# Allegro board carte_joystick2.brd
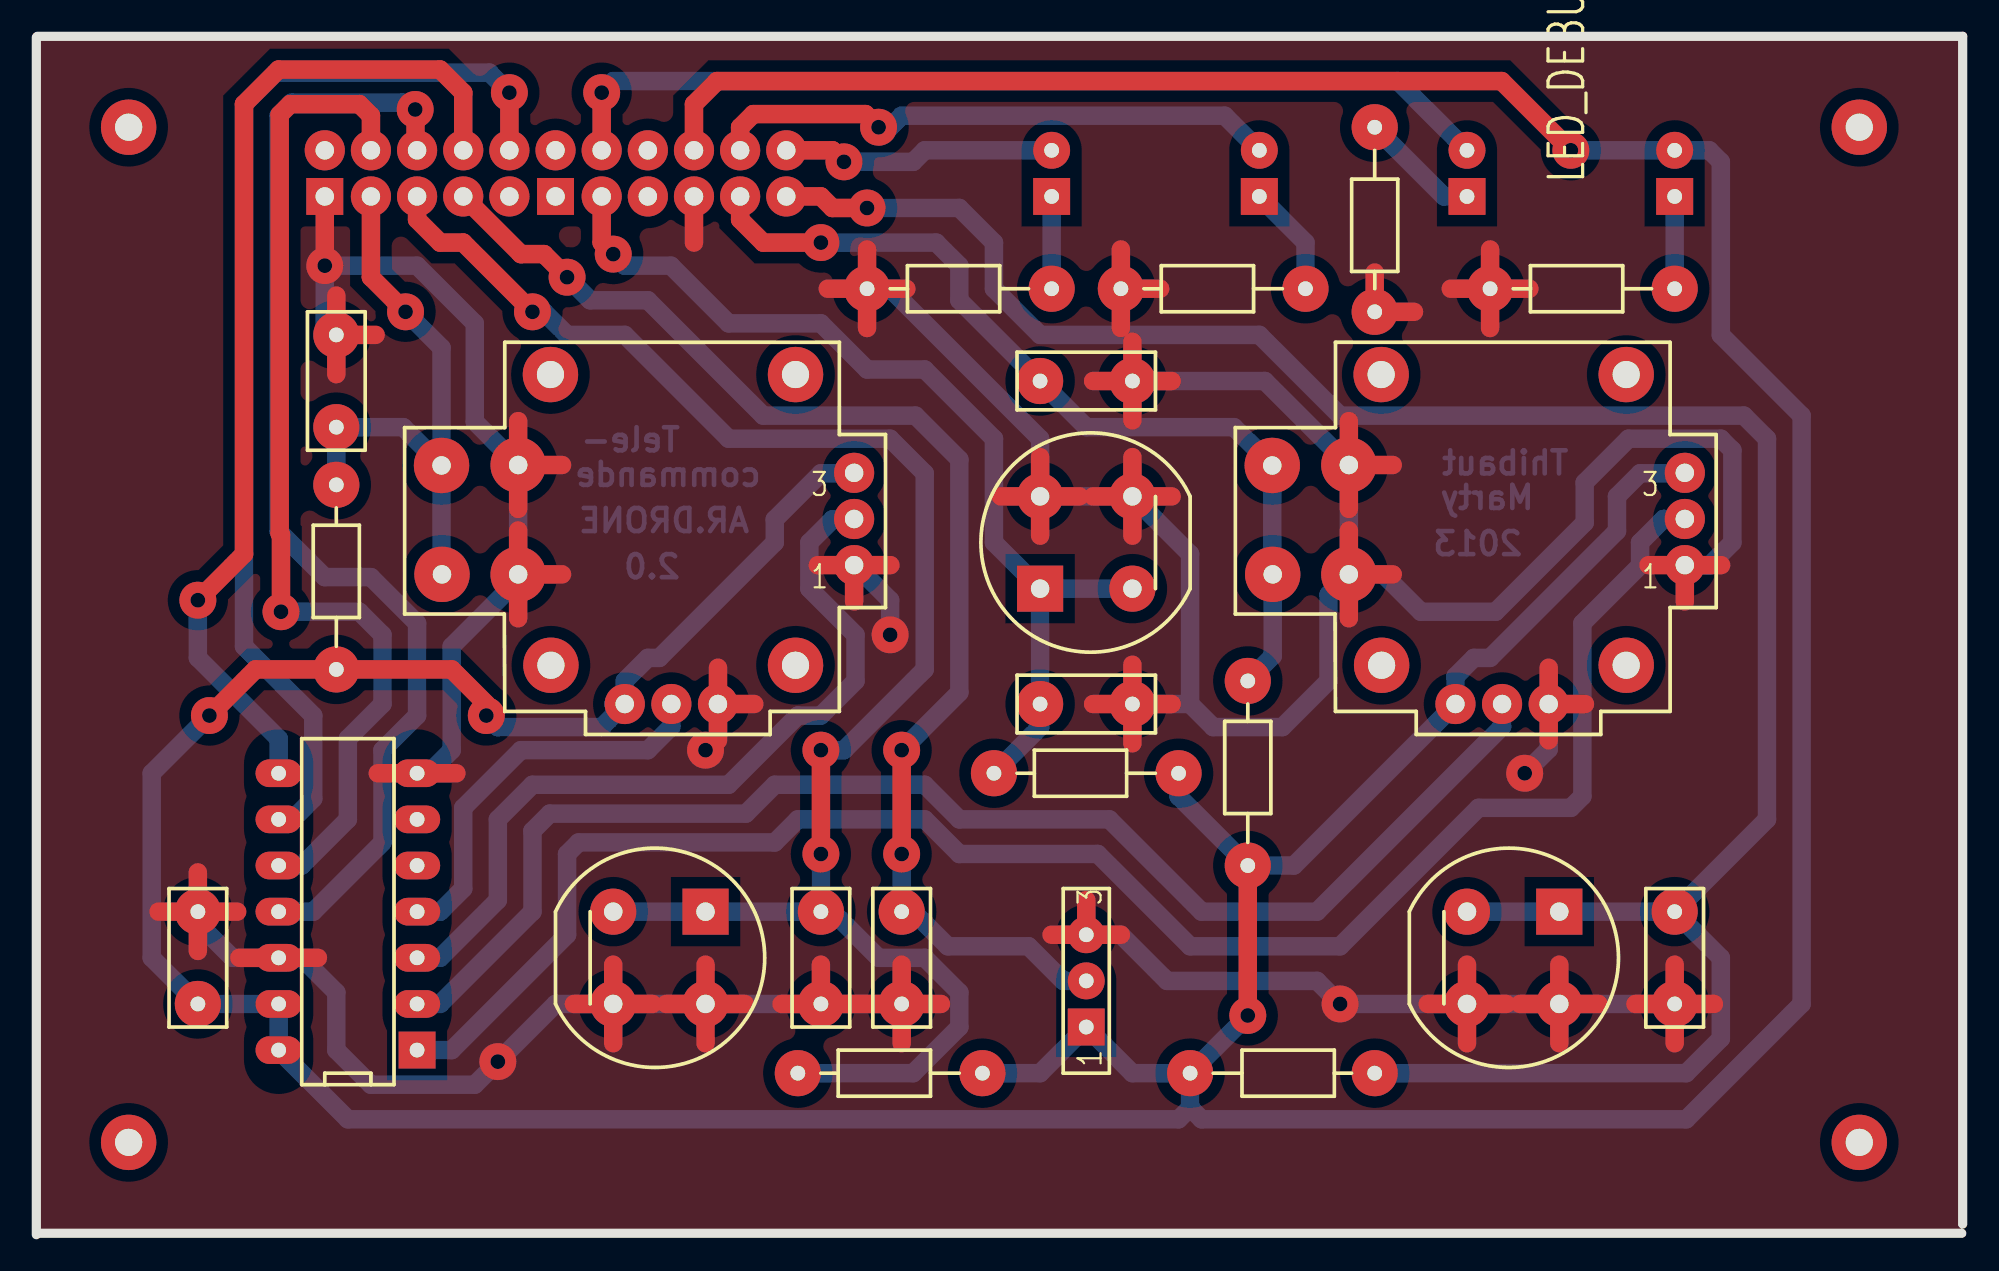
[diagram p0: board, top side]
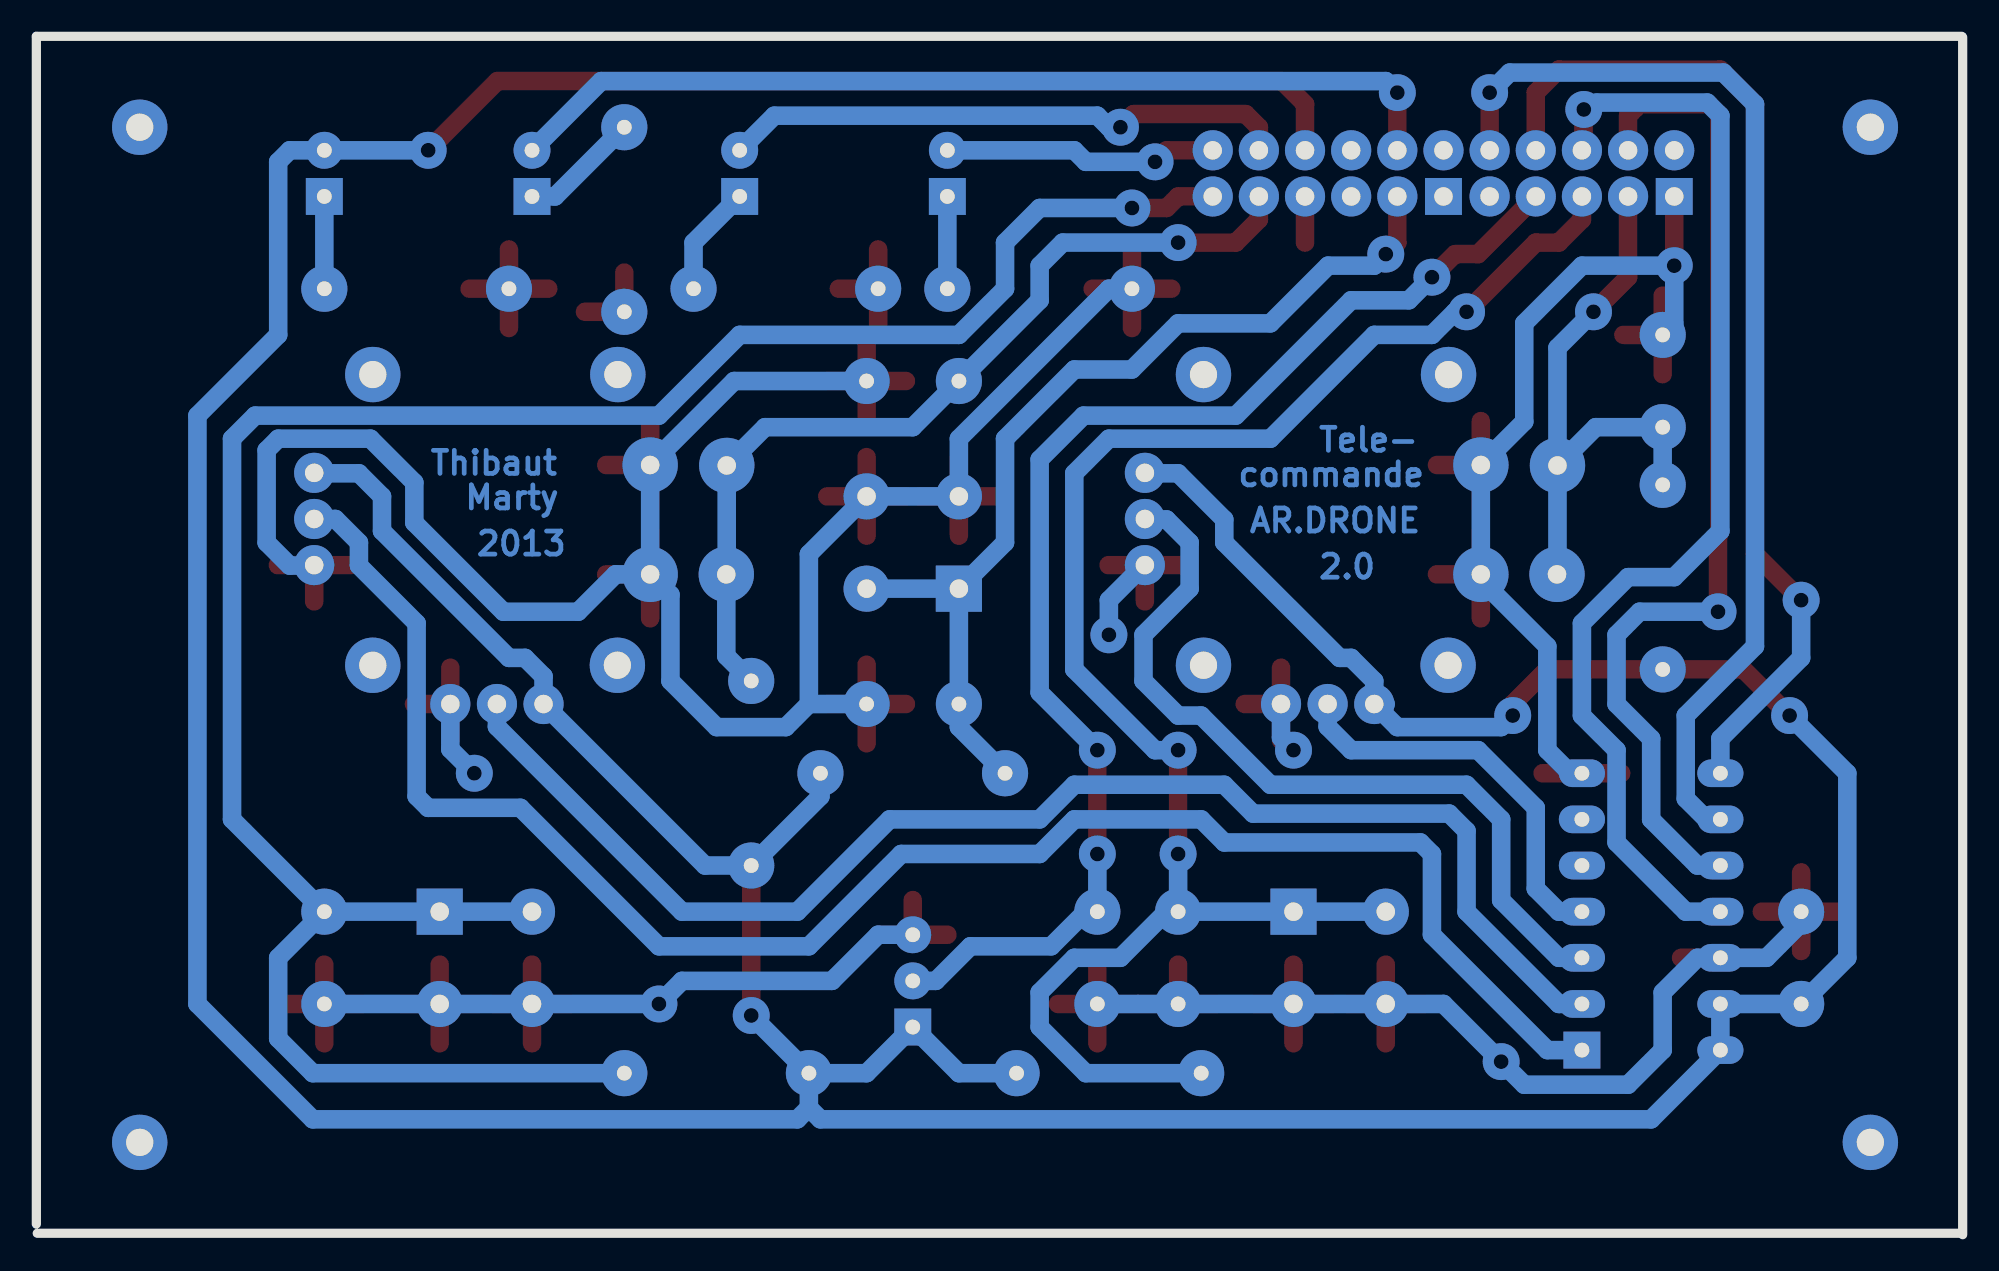
[diagram p1: board, bottom side, seen from below]

Outline 106.02 x 65.96 mm; copper layers: TOP, BOTTOM. Coordinates in mm from the lower left corner of the outline.

## Placement (name value [footprint] x y rotation side)
C1  100nF  [C]  55.24 29.21 0 top
C2  100nF  [C]  43.18 17.78 270 top
C3  100nF  [C]  90.17 17.78 270 top
C4  100nF  [C]  16.51 44.45 90 top
C5  100nF  [C]  55.24 46.99 0 top
C6  100nF  [C]  47.62 12.7 90 top
C7  100nF  [C]  8.89 12.7 90 top
J3  MCP3302  [DIL_14]  20.96 10.16 90 top
J5  CON10  [BARETTE2X5]  15.87 57.15 0 top
J6  CON12  [BARETTE2X6]  28.57 57.15 0 top
LED_ALIM  -  [LED]  90.17 57.15 90 top
LED_CONNECT  -  [LED]  55.88 57.15 90 top
LED_DEBUG  -  [LED]  78.74 57.15 90 top
LED_ERREUR  -  [LED]  67.31 57.15 90 top
NOREF  -  [unnamed]  -5.08 -5.08 0 top
P1  control  [MINISTICK2]  32.38 29.21 0 top
P2  inclinaison  [MINISTICK2]  78.11 29.21 0 top
R1  1k  [R_P]  52.7 25.4 0 top
R2  1k  [R_P]  41.91 8.89 0 top
R3  1k  [R_P]  73.66 8.89 180 top
R4  560  [R_P]  80.01 52.07 0 top
R5  560  [R_P]  45.72 52.07 0 top
R6  560  [R_P]  59.69 52.07 0 top
R7  560  [R_P]  73.66 50.8 90 top
R8  1k  [R_P]  16.51 41.27 270 top
R9  1k  [R_P]  66.67 30.48 270 top
SW_AU  -  [BP_4P]  55.24 35.56 0 top
SW_LAND  IWW6x2  [MINISWITCH]  57.78 11.43 90 top
SW_TR  -  [BP_4P]  83.82 17.78 180 top
SW_VI  -  [BP_4P]  36.83 17.78 180 top

## Library data of the parts
C1-C7 = C
J3 = CON14
J5 = CON10
J6 = CON12
LED_ALIM LED_CONNECT LED_DEBUG LED_ERREUR = LED
P1 P2 = Joystick
R1-R9 = R
SW_AU SW_TR SW_VI = BP_4P
SW_LAND = cummutateur_2pos

## Footprints (pads in the part's own frame, mm; a bottom-side part is the same pattern mirrored in y, then rotated)
BARETTE2X5
  rect 2.032x2.032 hole 1.016: 1(0,0)
  round 2.21 hole 1.016: 2(0,2.54) 3(2.54,0) 4(2.54,2.54) 5(5.08,0) 6(5.08,2.54) 7(7.62,0) 8(7.62,2.54) 9(10.16,0) 10(10.16,2.54)
BARETTE2X6
  rect 2.032x2.032 hole 1.016: 1(0,0)
  round 2.21 hole 1.016: 2(0,2.54) 3(2.54,0) 4(2.54,2.54) 5(5.08,0) 6(5.08,2.54) 7(7.62,0) 8(7.62,2.54) 9(10.16,0) 10(10.16,2.54) 11(12.7,0) 12(12.7,2.54)
BP_4P
  rect 2.54x2.54 hole 1.016: 1(0,0)
  round 2.54 hole 1.016: 2(0,5.08) 3(5.08,0) 4(5.08,5.08)
C
  round 2.54 hole 0.813: 1(0,0) 2(5.08,0)
DIL_14
  rect 2.032x2.032 hole 0.813: 1(0,0)
  oval 1.524x2.54 hole 0.813: 2(2.54,0) 3(5.08,0) 4(7.62,0) 5(10.16,0) 6(12.7,0) 7(15.24,0) 8(15.24,7.62) 9(12.7,7.62) 10(10.16,7.62) 11(7.62,7.62) 12(5.08,7.62) 13(2.54,7.62) 14(0,7.62)
LED
  round 2.032 hole 0.813: 1(2.54,0)
  rect 2.032x2.032 hole 0.813: 2(0,0)
MINISTICK2
  round 3.048 hole 1.499: (-4.089,18.136) (-4.064,2.134) (9.398,18.136) (9.398,2.134)
  round 2.21 hole 1.016: 1(12.624,7.645) 2(12.624,10.185) 3(12.624,12.725) 4(0,0) 5(2.565,0) 6(5.131,0)
  round 3.048 hole 1.016: 7(-5.867,13.157) 8(-5.867,7.137) 9(-10.084,13.132) 10(-10.058,7.137)
MINISWITCH
  rect 2.032x2.032 hole 0.813: 1(0,0)
  round 2.032 hole 0.813: 2(2.54,0) 3(5.08,0)
R_P
  round 2.54 hole 0.813: 1(0,0) 2(10.16,0)
unnamed
  round 3.048 hole 1.499: (10.16,66.04) (10.16,10.16) (105.41,66.04) (105.41,10.16)

## Nets
GND_POWER: C1.2 C2.2 C3.2 C4.2 C5.2 C6.1 C7.2 J3.7 J3.12 J5.1 J6.7 P1.1(PIN1) P1.6(PIN6) P1.7(PIN7) P1.8(PIN8) P2.1(PIN1) P2.6(PIN6) P2.7(PIN7) P2.8(PIN8) R4.1 R5.1 R6.1 R7.1 SW_AU.2 SW_AU.4 SW_LAND.3 SW_TR.2 SW_TR.4 SW_VI.2 SW_VI.4
VCC: C7.1 J3.13 J3.14 J5.2 J6.8 LED_ALIM.1(2) P1.3(PIN3) P1.4(PIN4) P2.3(PIN3) P2.4(PIN4) R1.2 R2.2 R3.2 R8.2 R9.2 SW_LAND.1
J1X: J3.3 P1.2(PIN2)
J1Y: J3.4 P1.5(PIN5)
J2X: J3.1 P2.2(PIN2)
J2Y: J3.2 P2.5(PIN5)
PC0: J6.10 LED_ERREUR.1(2)
PC1: C5.1 J6.9 P2.9(PIN9) P2.10(PIN10) R9.1
PC2: J6.12 LED_CONNECT.1(2)
PC3: C3.1 J6.11 R3.1 SW_TR.1 SW_TR.3
PD0: J6.2
PD2: J6.4 LED_DEBUG.1(2)
PD3: C1.1 J6.3 R1.1 SW_AU.1 SW_AU.3
PE0: J3.10 J5.4
PE1: C4.1 J5.3 P1.9(PIN9) P1.10(PIN10) R8.1
PE2: J3.11 J5.6
PE3: C2.1 J5.5 R2.1 SW_VI.1 SW_VI.3
PE5: J3.8 J5.8
PE6: C6.2 J5.7 SW_LAND.2
PE7: J3.9 J5.10
N045591: LED_ALIM.2(1) R4.2
N046171: LED_CONNECT.2(1) R5.2
N046751: LED_ERREUR.2(1) R6.2
N047331: LED_DEBUG.2(1) R7.2

Pads without a net: J3 5 6; J5 9; J6 1 5 6

## Via types
v1: diameter 2.032, hole 0.813, TOP to BOTTOM, 27 vias

## Routing (per net, layer and track width the routed paths; a pad name or vN(x,y) marks a point on that pad's centre or on a via; arc(x,y) is an arc through that point)
GND_POWER: length 453.3
  TOP w1.016: 83.24,27.21 P2.6 ; P2.6 83.24,31.21 ; P2.6 85.23,29.21 ; J6.7 36.2,54.61 ; P1.8 26.52,38.76 ; P1.8 26.52,33.93 ; P1.8 28.93,36.35 ; R6.1 61.85,52.07 ; R6.1 59.69,49.91 ; R6.1 59.69,54.23 ; 55.88,16.51 SW_LAND.3 ; SW_LAND.3 59.69,16.51 ; SW_LAND.3 57.78,18.42 ; 81.66,12.7 SW_TR.2 ; SW_TR.2 83.82,14.86 ; SW_TR.2 83.82,10.54 ; SW_TR.2 85.98,12.7 ; P1.1 47.01,36.86 ; P1.1 45.01,34.86 ; P1.1 43.01,36.86 ; SW_VI.2 36.83,14.86 ; SW_VI.2 36.83,10.54 ; SW_VI.2 34.67,12.7 ; SW_VI.2 38.99,12.7 ; SW_AU.4 62.49,40.64 ; SW_AU.4 60.33,42.8 ; SW_AU.4 60.33,38.48 ; SW_AU.4 58.16,40.64 ; 60.33,27.05 C1.2 ; C1.2 60.33,31.37 ; C1.2 62.49,29.21 ; C1.2 58.16,29.21 ; P2.1 92.73,36.86 ; P2.1 88.73,36.86 ; P2.1 90.73,34.86 ; R5.1 45.72,54.23 ; R5.1 45.72,49.91 ; R5.1 47.88,52.07 ; R5.1 43.56,52.07 ; 72.24,39.95 P2.7 ; P2.7 74.65,42.37 ; P2.7 72.24,44.78 ; 78.74,10.54 SW_TR.4 ; SW_TR.4 80.9,12.7 ; SW_TR.4 76.58,12.7 ; SW_TR.4 78.74,14.86 ; SW_AU.2 57.41,40.64 ; SW_AU.2 53.08,40.64 ; SW_AU.2 55.24,42.8 ; SW_AU.2 55.24,38.48 ; R4.1 82.17,52.07 ; R4.1 77.85,52.07 ; R4.1 80.01,54.23 ; R4.1 80.01,49.91 ; 75.82,50.8 R7.1 73.66,52.96 ; C4.2 18.67,49.53 ; C4.2 16.51,47.37 ; C4.2 16.51,51.69 ; 58.16,46.99 C5.2 ; C5.2 60.33,49.15 ; C5.2 60.33,44.83 ; C5.2 62.49,46.99 ; P1.6 37.52,31.21 ; P1.6 37.52,27.21 ; P1.6 39.51,29.21 ; C7.2 11.05,17.78 ; C7.2 6.73,17.78 ; C7.2 8.89,19.94 ; C7.2 8.89,15.62 ; 72.24,33.93 P2.8 ; P2.8 74.65,36.35 ; P2.8 72.24,38.76 ; 29.59,12.7 SW_VI.4 ; SW_VI.4 33.91,12.7 ; SW_VI.4 31.75,10.54 ; SW_VI.4 31.75,14.86 ; 15.5,15.24 J3.12 11.17,15.24 ; 23.12,25.4 J3.7 18.79,25.4 ; 88.01,12.7 C3.2 ; C3.2 90.17,14.86 ; C3.2 92.33,12.7 ; C3.2 90.17,10.54 ; 47.62,10.54 C6.1 ; C6.1 45.46,12.7 ; C6.1 47.62,14.86 ; C6.1 49.79,12.7 ; 41.02,12.7 C2.2 ; C2.2 45.34,12.7 ; C2.2 43.18,14.86 ; P1.7 26.52,44.78 ; P1.7 28.93,42.37 ; P1.7 26.52,39.95 ; J5.1 v1(15.87,53.34)
  BOTTOM w1.016: P1.6 37.52,27.36 v1(36.83,26.67) ; C3.2 SW_TR.2 SW_TR.4 v1(71.75,12.7) 70.48,13.97 62.23,13.97 59.69,16.51 SW_LAND.3 ; v1(81.91,25.4) 83.24,26.72 P2.6 ; P2.1 90.75,36.83 92.08,36.83 93.34,38.1 93.34,43.18 92.71,43.81 87.63,43.81 85.22,41.4 85.22,39.19 80.31,34.29 76.2,34.29 74.14,36.35 P2.8 ; 63.5,29.21 63.5,37.46 SW_AU.4 SW_AU.2 55.24,43.81 46.99,52.07 R5.1 ; 63.5,29.21 64.77,27.94 68.58,27.94 71.12,30.48 71.12,35.23 P2.8 ; 63.5,29.21 C1.2 ; P2.8 P2.7 67.61,46.99 C5.2 ; P1.1 45.06,36.86 46.99,34.92 v1(46.99,33.02) ; C7.2 8.89,17.15 10.79,15.24 J3.12 14.6,15.24 16.51,13.33 16.51,10.16 18.42,8.26 24.13,8.26 v1(25.4,9.53) 28.57,12.7 SW_VI.4 SW_VI.2 C2.2 C6.1 48.26,12.7 ; C4.2 15.87,50.16 v1(15.87,53.34) 20.96,53.34 24.13,50.16 24.13,44.75 P1.7 P1.8 26.52,36.04 22.86,32.38 22.86,26.67 21.59,25.4 J3.7
VCC: length 339.4
  TOP w1.016: v1(9.53,28.57) 12.06,31.12 R8.2 22.86,31.12 24.77,29.21 v1(24.77,28.57) ; v1(84.45,59.69) 80.64,63.5 37.46,63.5 36.2,62.23 J6.8 ; R9.2 v1(66.67,12.06)
  BOTTOM w1.016: 63.5,6.99 64.13,6.35 90.8,6.35 97.16,12.7 97.16,45.09 92.71,49.53 92.71,59.05 92.08,59.69 LED_ALIM.1 v1(84.45,59.69) ; 63.5,6.99 R3.2 ; 63.5,6.99 62.86,6.35 17.14,6.35 J3.14 J3.13 C7.1 6.35,15.24 6.35,25.4 v1(9.53,28.57) ; R3.2 v1(66.67,12.06) ; R3.2 60.33,8.89 SW_LAND.1 55.24,8.89 R2.2 ; 31.75,29.21 P1.4 ; P1.4 31.11,27.94 25.4,27.94 v1(24.77,28.57) ; P1.4 32.38,30.48 33.66,31.75 34.29,31.75 40.64,38.1 40.64,39.37 43.18,41.91 44.98,41.91 P1.3 ; R1.2 62.86,24.13 R9.2 69.22,20.32 P2.4 78.11,30.73 79.12,31.75 80.01,31.75 87,38.73 87,40.64 88.27,41.91 90.7,41.91 P2.3
J1X: length 44.7
  BOTTOM w1.016: J3.3 22.23,15.24 25.4,18.41 25.4,22.86 27.3,24.77 38.1,24.77 41.91,28.57 43.18,28.57 45.09,30.48 45.09,33.02 42.54,35.56 42.54,38.1 43.81,39.37 44.98,39.37 P1.2
J1Y: length 22.1
  BOTTOM w1.016: J3.4 22.23,17.78 23.5,19.05 23.5,23.49 26.67,26.67 33.66,26.67 34.95,27.97 P1.5
J2X: length 96.6
  BOTTOM w1.016: P2.2 89.56,39.4 88.27,38.1 88.27,36.83 85.09,33.66 85.09,24.13 84.45,23.49 79.38,23.49 71.75,15.88 63.5,15.88 58.42,20.95 50.8,20.95 48.89,22.86 41.91,22.86 40.64,21.59 29.85,21.59 29.21,20.95 29.21,16.51 22.86,10.16 J3.1
J2Y: length 75.7
  BOTTOM w1.016: J3.2 22.23,12.7 27.3,17.78 27.3,22.23 28.26,23.18 39.05,23.18 40.64,24.77 48.89,24.77 50.8,22.86 59.05,22.86 64.13,17.78 70.48,17.78 80.67,27.97 P2.5
PC0: length 31.5
  TOP w1.016: J6.10 38.73,60.96 39.46,61.68 45.63,61.68 v1(46.35,60.96)
  BOTTOM w1.016: LED_ERREUR.1 65.41,61.59 47.62,61.59 46.99,60.96 v1(46.35,60.96)
PC1: length 49.7
  TOP w1.016: v1(43.18,54.61) 40,54.61 38.73,55.88 J6.9
  BOTTOM w1.016: v1(43.18,54.61) 49.53,54.61 50.8,53.34 50.8,51.43 C5.1 57.78,44.45 65.91,44.45 P2.9 68.02,36.37 P2.10 68.05,31.85 R9.1
PC2: length 15.1
  TOP w1.016: v1(44.45,59.05) 43.81,59.69 J6.12
  BOTTOM w1.016: LED_CONNECT.1 48.89,59.69 48.26,59.05 v1(44.45,59.05)
PC3: length 128.4
  TOP w1.016: v1(45.72,56.52) 43.81,56.52 43.18,57.15 J6.11
  BOTTOM w1.016: SW_TR.3 SW_TR.1 C3.1 ; C3.1 92.71,15.24 92.71,10.79 90.8,8.89 R3.1 ; C3.1 95.25,22.86 95.25,43.81 93.98,45.09 71.75,45.09 67.31,49.53 55.24,49.53 52.7,52.07 52.7,54.61 50.8,56.52 v1(45.72,56.52)
PD2: length 52.6
  TOP w1.016: v1(31.11,62.87) J6.4
  BOTTOM w1.016: v1(31.11,62.87) 31.75,63.5 74.93,63.5 LED_DEBUG.1
PD3: length 54.2
  TOP w1.016: v1(31.75,53.98) 31.11,54.61 J6.3
  BOTTOM w1.016: SW_AU.1 C1.1 55.24,27.94 R1.1 ; SW_AU.1 SW_AU.3 ; SW_AU.1 52.7,38.1 52.7,43.81 48.89,47.62 45.72,47.62 43.18,50.16 38.1,50.16 34.92,53.34 32.38,53.34 v1(31.75,53.98)
PE0: length 56.7
  TOP w1.016: v1(13.46,34.29) 13.46,38.52 13.39,38.59 13.39,61.65 13.97,62.23 17.78,62.23 18.42,61.59 J5.4
  BOTTOM w1.016: J3.10 14.6,20.32 17.14,22.86 17.14,27.3 19.05,29.21 19.05,33.02 17.78,34.29 v1(13.46,34.29)
PE1: length 32.3
  TOP w1.016: v1(20.32,50.8) 18.42,52.7 J5.3
  BOTTOM w1.016: R8.1 C4.1 20.19,44.45 P1.9 ; P1.9 22.3,48.82 v1(20.32,50.8) ; P1.9 22.3,36.37 P1.10
PE2: length 63
  TOP w1.016: J5.6 20.87,59.78 20.87,61.92 v1(20.85,61.94)
  BOTTOM w1.016: v1(20.85,61.94) 20.53,61.94 20.15,62.32 14.06,62.32 13.33,61.59 13.33,38.73 15.87,36.2 18.42,36.2 20.96,33.66 20.96,28.57 19.05,26.67 19.05,21.59 15.24,17.78 J3.11
PE3: length 95
  TOP w1.016: v1(43.18,20.95) v1(43.18,26.67) ; J5.5 20.96,55.88 22.23,54.61 23.5,54.61 v1(27.3,50.8)
  BOTTOM w1.016: C2.1 43.81,17.78 46.35,15.24 48.89,15.24 50.8,13.33 50.8,11.43 48.26,8.89 R2.1 ; C2.1 v1(43.18,20.95) ; C2.1 SW_VI.1 SW_VI.3 ; v1(27.3,50.8) 27.94,50.8 29.21,49.53 32.38,49.53 38.1,43.81 46.99,43.81 48.89,41.91 48.89,31.12 44.45,26.67 v1(43.18,26.67)
PE5: length 56.3
  TOP w1.016: v1(8.89,34.92) 11.43,37.46 11.43,62.23 13.33,64.14 22.23,64.14 23.5,62.87 J5.8
  BOTTOM w1.016: J3.8 13.33,27.3 8.89,31.75 v1(8.89,34.92)
PE6: length 71.2
  TOP w1.016: v1(29.21,52.7) 27.94,53.98 26.67,53.98 J5.7 ; v1(47.62,20.95) v1(47.62,26.67)
  BOTTOM w1.016: v1(29.21,52.7) 30.48,51.43 33.66,51.43 40,45.09 48.39,45.09 50.8,42.67 50.8,29.84 v1(47.62,26.67) ; v1(47.62,20.95) C6.2 48.26,17.78 50.16,15.88 54.61,15.88 56.52,13.97 SW_LAND.2
PE7: length 61.1
  TOP w1.016: v1(26.04,62.87) J5.10
  BOTTOM w1.016: v1(26.04,62.87) 24.93,63.97 13.17,63.97 11.43,62.23 11.43,32.38 15.24,28.57 15.24,24 14.1,22.86 J3.9
N045591: length 5.1
  BOTTOM w1.016: R4.2 LED_ALIM.2
N046171: length 5.1
  BOTTOM w1.016: R5.2 LED_CONNECT.2
N046751: length 6.1
  BOTTOM w1.016: R6.2 69.85,54.61 LED_ERREUR.2
N047331: length 6.7
  BOTTOM w1.016: R7.2 77.47,57.15 LED_DEBUG.2

## Copper pours and planes (outline as drawn; the poured copper is in the pictures)
GND_POWER on TOP: 0,66.04 0,0 106.05,0 106.05,66.04

## Text on the board
BOTTOM: Tele- | 2.0 | AR.DRONE | commande | 2013 | Marty | Thibaut
